# Altium PCB PcbPanel.PcbDoc
Units mm, origin at the board's own origin, x right, y up, seen from the top; angles counter-clockwise.
Board outline 167.8 x 101.4 mm, 2 copper layers (Top Layer, Bottom Layer), stack 1.092 mm thick; 6 components, 178 nets, 10 pads, 0 vias.
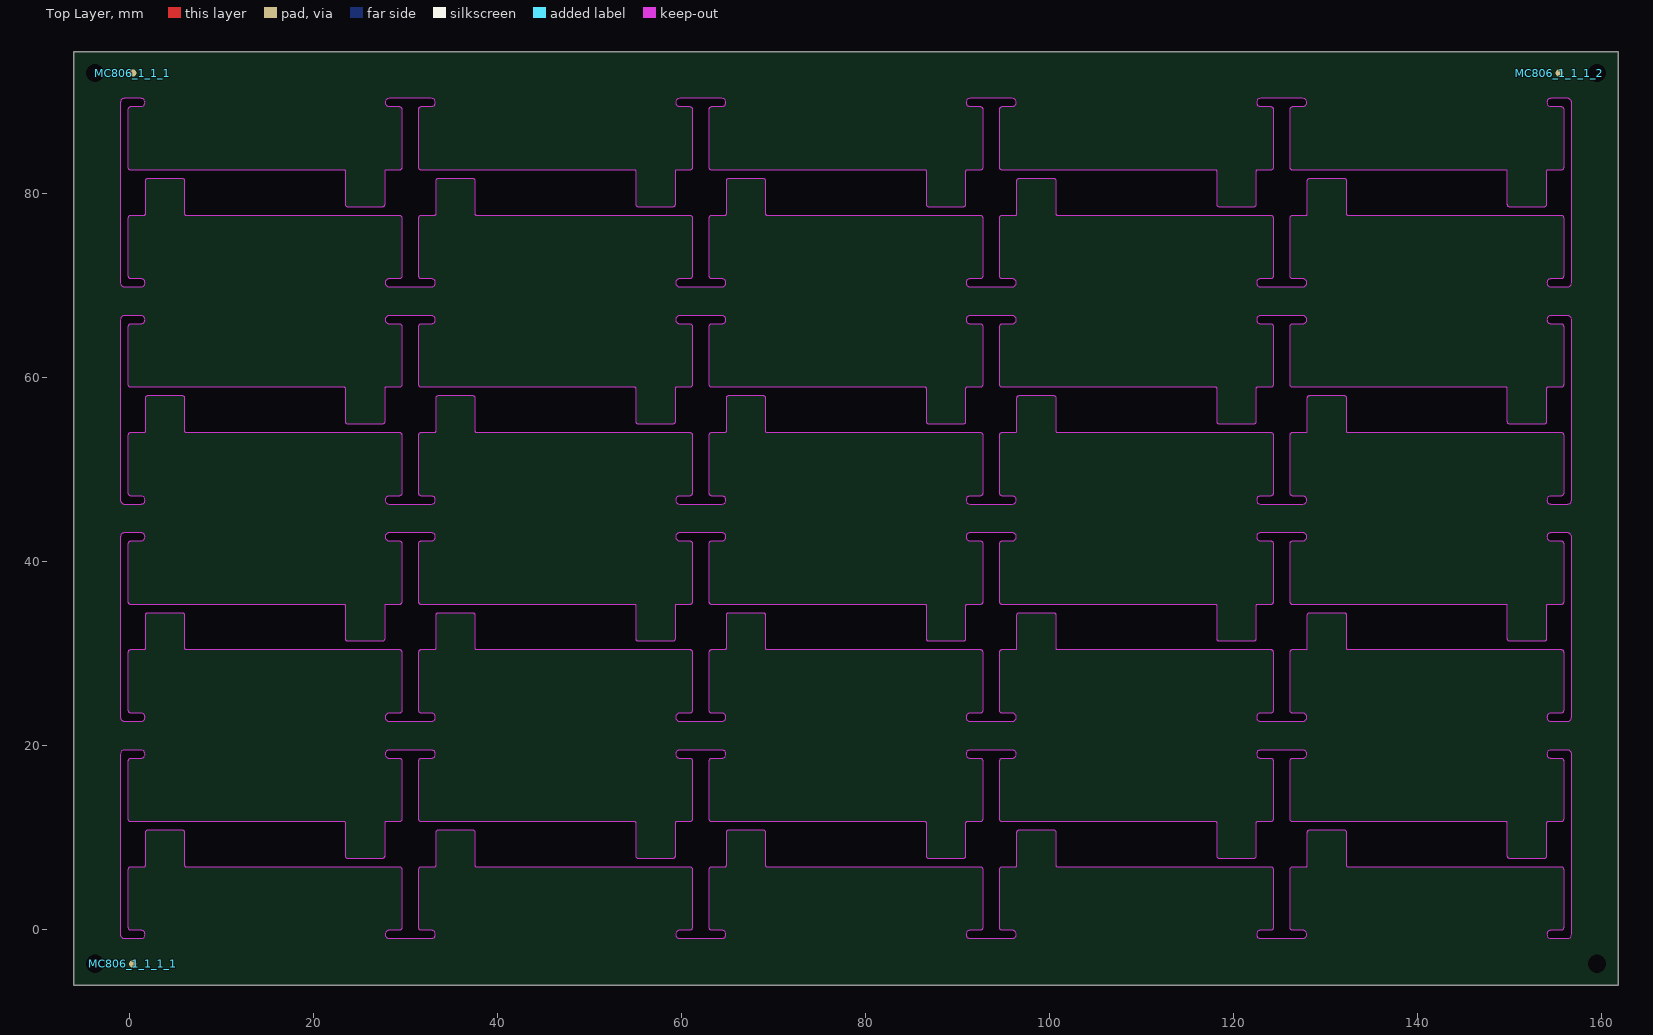
[diagram p0: Top Layer view]
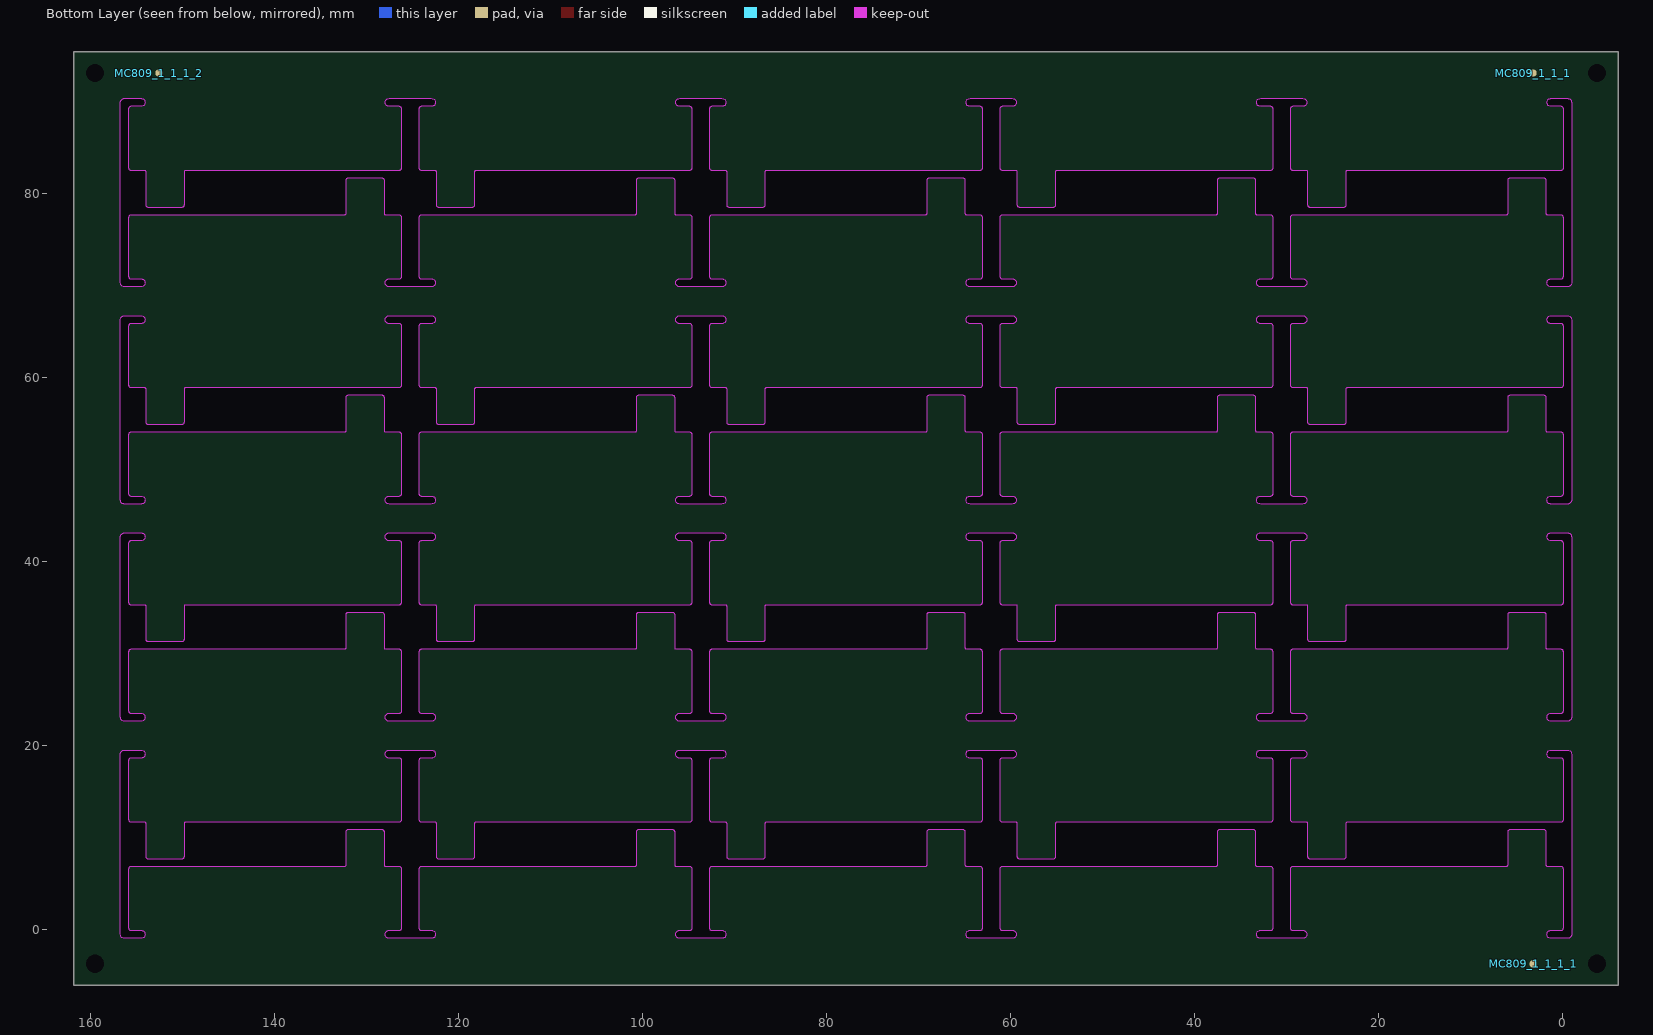
[diagram p1: Bottom Layer view, seen from below]

## Layer stack, top to bottom
Top Solder: solder mask 0.0102, SM-001, Dk 4
Top Layer: signal copper 0.0356
Dielectric 1: prepreg 0.2104, PP-017, Dk 4.3
Dielectric 3: core 0.6, Core-039, Dk 4.8
Dielectric 5: prepreg 0.2104, PP-017, Dk 4.3
Bottom Layer: signal copper 0.0356
Bottom Solder: solder mask 0.0102, SM-001, Dk 4

## Board outline
-6,-6 -6,95.4 161.8,95.4 161.8,-6
cut-out: -0.936,46.7 ccw(c-0.5,46.7) -0.5,46.264 1.3,46.264 1.301,46.264 ccw(c1.3,46.7) 1.736,46.7 ccw(c1.3,46.7) 1.3,47.136 0.2,47.136 cw(c0.2,47.4) -0.064,47.4 -0.064,53.8 cw(c0.2,53.8) 0.2,54.064 1.66,54.064 ccw(c1.66,54.2) 1.796,54.2 1.796,57.8 cw(c2.06,57.8) 2.06,58.064 5.76,58.064 cw(c5.76,57.8) 6.024,57.8 6.024,54.2 ccw(c6.16,54.2) 6.16,54.064 29.36,54.064 cw(c29.36,53.8) 29.624,53.8 29.624,47.4 29.624,47.395 cw(c29.36,47.4) 29.36,47.136 28.26,47.136 28.258,47.136 ccw(c28.26,46.7) 27.823,46.7 ccw(c28.26,46.7) 28.259,46.264 28.26,46.264 32.86,46.264 32.861,46.264 ccw(c32.86,46.7) 33.296,46.7 ccw(c32.86,46.7) 32.86,47.136 31.76,47.136 cw(c31.76,47.4) 31.496,47.4 31.496,53.8 cw(c31.76,53.8) 31.76,54.064 33.22,54.064 ccw(c33.22,54.2) 33.356,54.2 33.356,57.8 cw(c33.62,57.8) 33.62,58.064 37.32,58.064 cw(c37.32,57.8) 37.584,57.8 37.584,54.2 ccw(c37.72,54.2) 37.72,54.064 60.92,54.064 cw(c60.92,53.8) 61.184,53.8 61.184,47.4 61.184,47.395 cw(c60.92,47.4) 60.92,47.136 59.82,47.136 59.818,47.136 ccw(c59.82,46.7) 59.383,46.7 ccw(c59.82,46.7) 59.819,46.264 59.82,46.264 64.42,46.264 64.421,46.264 ccw(c64.42,46.7) 64.856,46.7 ccw(c64.42,46.7) 64.42,47.136 63.32,47.136 cw(c63.32,47.4) 63.056,47.4 63.056,53.8 cw(c63.32,53.8) 63.32,54.064 64.78,54.064 ccw(c64.78,54.2) 64.916,54.2 64.916,57.8 cw(c65.18,57.8) 65.18,58.064 68.88,58.064 cw(c68.88,57.8) 69.144,57.8 69.144,54.2 ccw(c69.28,54.2) 69.28,54.064 92.48,54.064 cw(c92.48,53.8) 92.744,53.8 92.744,47.4 92.744,47.395 cw(c92.48,47.4) 92.48,47.136 91.38,47.136 91.378,47.136 ccw(c91.38,46.7) 90.943,46.7 ccw(c91.38,46.7) 91.379,46.264 91.38,46.264 95.98,46.264 95.981,46.264 ccw(c95.98,46.7) 96.416,46.7 ccw(c95.98,46.7) 95.98,47.136 94.88,47.136 cw(c94.88,47.4) 94.616,47.4 94.616,53.8 cw(c94.88,53.8) 94.88,54.064 96.34,54.064 ccw(c96.34,54.2) 96.476,54.2 96.476,57.8 cw(c96.74,57.8) 96.74,58.064 100.44,58.064 cw(c100.44,57.8) 100.704,57.8 100.704,54.2 ccw(c100.84,54.2) 100.84,54.064 124.04,54.064 cw(c124.04,53.8) 124.304,53.8 124.304,47.4 cw(c124.04,47.4) 124.04,47.136 122.94,47.136 122.938,47.136 ccw(c122.94,46.7) 122.504,46.7 ccw(c122.94,46.7) 122.939,46.264 122.94,46.264 127.54,46.264 127.541,46.264 ccw(c127.54,46.7) 127.976,46.7 ccw(c127.54,46.7) 127.54,47.136 126.44,47.136 cw(c126.44,47.4) 126.176,47.4 126.176,53.8 cw(c126.44,53.8) 126.44,54.064 127.9,54.064 ccw(c127.9,54.2) 128.036,54.2 128.036,57.8 cw(c128.3,57.8) 128.3,58.064 132,58.064 cw(c132,57.8) 132.264,57.8 132.264,54.2 ccw(c132.4,54.2) 132.4,54.064 155.6,54.064 cw(c155.6,53.8) 155.864,53.8 155.864,47.4 cw(c155.6,47.4) 155.6,47.136 154.5,47.136 ccw(c154.5,46.7) 154.064,46.7 ccw(c154.5,46.7) 154.499,46.264 154.5,46.264 156.3,46.264 ccw(c156.3,46.7) 156.736,46.696 156.736,46.7 156.736,66.3 ccw(c156.3,66.3) 156.3,66.736 154.5,66.736 154.499,66.736 ccw(c154.5,66.3) 154.064,66.3 ccw(c154.5,66.3) 154.5,65.864 155.6,65.864 cw(c155.6,65.6) 155.864,65.6 155.864,59.2 cw(c155.6,59.2) 155.6,58.936 154.14,58.936 ccw(c154.14,58.8) 154.004,58.8 154.004,55.2 cw(c153.74,55.2) 153.74,54.936 150.04,54.936 cw(c150.04,55.2) 149.776,55.2 149.776,58.8 ccw(c149.64,58.8) 149.64,58.936 126.44,58.936 cw(c126.44,59.2) 126.176,59.2 126.176,65.6 126.176,65.605 cw(c126.44,65.6) 126.44,65.864 127.539,65.864 127.542,65.864 ccw(c127.54,66.3) 127.976,66.3 ccw(c127.54,66.3) 127.541,66.736 127.54,66.736 122.94,66.736 122.939,66.736 ccw(c122.94,66.3) 122.504,66.3 ccw(c122.94,66.3) 122.94,65.864 124.04,65.864 cw(c124.04,65.6) 124.304,65.6 124.304,59.2 cw(c124.04,59.2) 124.04,58.936 122.58,58.936 ccw(c122.58,58.8) 122.444,58.8 122.444,55.2 cw(c122.18,55.2) 122.18,54.936 118.48,54.936 cw(c118.48,55.2) 118.216,55.2 118.216,58.8 ccw(c118.08,58.8) 118.08,58.936 94.88,58.936 cw(c94.88,59.2) 94.616,59.2 94.616,65.6 94.616,65.605 cw(c94.88,65.6) 94.88,65.864 95.979,65.864 95.982,65.864 ccw(c95.98,66.3) 96.416,66.3 ccw(c95.98,66.3) 95.981,66.736 95.98,66.736 91.38,66.736 91.379,66.736 ccw(c91.38,66.3) 90.944,66.3 ccw(c91.38,66.3) 91.38,65.864 92.48,65.864 cw(c92.48,65.6) 92.744,65.6 92.744,59.2 cw(c92.48,59.2) 92.48,58.936 91.02,58.936 ccw(c91.02,58.8) 90.884,58.8 90.884,55.2 cw(c90.62,55.2) 90.62,54.936 86.92,54.936 cw(c86.92,55.2) 86.656,55.2 86.656,58.8 ccw(c86.52,58.8) 86.52,58.936 63.32,58.936 cw(c63.32,59.2) 63.056,59.2 63.056,65.6 63.056,65.605 cw(c63.32,65.6) 63.32,65.864 64.419,65.864 64.422,65.864 ccw(c64.42,66.3) 64.856,66.3 ccw(c64.42,66.3) 64.421,66.736 64.42,66.736 59.82,66.736 59.819,66.736 ccw(c59.82,66.3) 59.384,66.3 ccw(c59.82,66.3) 59.82,65.864 60.92,65.864 cw(c60.92,65.6) 61.184,65.6 61.184,59.2 cw(c60.92,59.2) 60.92,58.936 59.46,58.936 ccw(c59.46,58.8) 59.324,58.8 59.324,55.2 cw(c59.06,55.2) 59.06,54.936 55.36,54.936 cw(c55.36,55.2) 55.096,55.2 55.096,58.8 ccw(c54.96,58.8) 54.96,58.936 31.76,58.936 cw(c31.76,59.2) 31.496,59.2 31.496,65.6 cw(c31.76,65.6) 31.76,65.864 32.859,65.864 32.861,65.864 ccw(c32.86,66.3) 33.296,66.3 ccw(c32.86,66.3) 32.861,66.736 32.86,66.736 28.26,66.736 28.259,66.736 ccw(c28.26,66.3) 27.823,66.3 ccw(c28.26,66.3) 28.26,65.864 29.36,65.864 cw(c29.36,65.6) 29.624,65.6 29.624,59.2 cw(c29.36,59.2) 29.36,58.936 27.9,58.936 ccw(c27.9,58.8) 27.764,58.8 27.764,55.2 cw(c27.5,55.2) 27.5,54.936 23.8,54.936 cw(c23.8,55.2) 23.536,55.2 23.536,58.8 ccw(c23.4,58.8) 23.4,58.936 0.2,58.936 cw(c0.2,59.2) -0.064,59.2 -0.064,65.6 cw(c0.2,65.6) 0.2,65.864 1.3,65.864 ccw(c1.3,66.3) 1.736,66.3 ccw(c1.3,66.3) 1.3,66.736 -0.5,66.736 ccw(c-0.5,66.3) -0.936,66.304 -0.936,66.3
cut-out: -0.936,70.3 ccw(c-0.5,70.3) -0.5,69.864 1.3,69.864 1.301,69.864 ccw(c1.3,70.3) 1.736,70.3 ccw(c1.3,70.3) 1.3,70.736 0.2,70.736 cw(c0.2,71) -0.064,71 -0.064,77.4 cw(c0.2,77.4) 0.2,77.664 1.66,77.664 ccw(c1.66,77.8) 1.796,77.8 1.796,81.4 cw(c2.06,81.4) 2.06,81.664 5.76,81.664 cw(c5.76,81.4) 6.024,81.4 6.024,77.8 ccw(c6.16,77.8) 6.16,77.664 29.36,77.664 cw(c29.36,77.4) 29.624,77.4 29.624,71 29.623,70.995 cw(c29.36,71) 29.36,70.736 28.26,70.736 28.258,70.736 ccw(c28.26,70.3) 27.823,70.3 ccw(c28.26,70.3) 28.259,69.864 28.26,69.864 32.86,69.864 32.861,69.864 ccw(c32.86,70.3) 33.296,70.3 ccw(c32.86,70.3) 32.86,70.736 31.76,70.736 cw(c31.76,71) 31.496,71 31.496,77.4 cw(c31.76,77.4) 31.76,77.664 33.22,77.664 ccw(c33.22,77.8) 33.356,77.8 33.356,81.4 cw(c33.62,81.4) 33.62,81.664 37.32,81.664 cw(c37.32,81.4) 37.584,81.4 37.584,77.8 ccw(c37.72,77.8) 37.72,77.664 60.92,77.664 cw(c60.92,77.4) 61.184,77.4 61.184,71 61.183,70.995 cw(c60.92,71) 60.92,70.736 59.82,70.736 59.818,70.736 ccw(c59.82,70.3) 59.383,70.3 ccw(c59.82,70.3) 59.819,69.864 59.82,69.864 64.42,69.864 64.421,69.864 ccw(c64.42,70.3) 64.856,70.3 ccw(c64.42,70.3) 64.42,70.736 63.32,70.736 cw(c63.32,71) 63.056,71 63.056,77.4 cw(c63.32,77.4) 63.32,77.664 64.78,77.664 ccw(c64.78,77.8) 64.916,77.8 64.916,81.4 cw(c65.18,81.4) 65.18,81.664 68.88,81.664 cw(c68.88,81.4) 69.144,81.4 69.144,77.8 ccw(c69.28,77.8) 69.28,77.664 92.48,77.664 cw(c92.48,77.4) 92.744,77.4 92.744,71 92.744,70.995 cw(c92.48,71) 92.48,70.736 91.38,70.736 91.378,70.736 ccw(c91.38,70.3) 90.943,70.3 ccw(c91.38,70.3) 91.379,69.864 91.38,69.864 95.98,69.864 95.981,69.864 ccw(c95.98,70.3) 96.416,70.3 ccw(c95.98,70.3) 95.98,70.736 94.88,70.736 cw(c94.88,71) 94.616,71 94.616,77.4 cw(c94.88,77.4) 94.88,77.664 96.34,77.664 ccw(c96.34,77.8) 96.476,77.8 96.476,81.4 cw(c96.74,81.4) 96.74,81.664 100.44,81.664 cw(c100.44,81.4) 100.704,81.4 100.704,77.8 ccw(c100.84,77.8) 100.84,77.664 124.04,77.664 cw(c124.04,77.4) 124.304,77.4 124.304,71 cw(c124.04,71) 124.04,70.736 122.94,70.736 122.938,70.736 ccw(c122.94,70.3) 122.504,70.3 ccw(c122.94,70.3) 122.939,69.864 122.94,69.864 127.54,69.864 127.541,69.864 ccw(c127.54,70.3) 127.976,70.3 ccw(c127.54,70.3) 127.54,70.736 126.44,70.736 cw(c126.44,71) 126.176,71 126.176,77.4 cw(c126.44,77.4) 126.44,77.664 127.9,77.664 ccw(c127.9,77.8) 128.036,77.8 128.036,81.4 cw(c128.3,81.4) 128.3,81.664 132,81.664 cw(c132,81.4) 132.264,81.4 132.264,77.8 ccw(c132.4,77.8) 132.4,77.664 155.6,77.664 cw(c155.6,77.4) 155.864,77.4 155.864,71 cw(c155.6,71) 155.6,70.736 154.5,70.736 ccw(c154.5,70.3) 154.064,70.3 ccw(c154.5,70.3) 154.499,69.864 154.5,69.864 156.3,69.864 ccw(c156.3,70.3) 156.736,70.296 156.736,70.3 156.736,89.9 ccw(c156.3,89.9) 156.3,90.336 154.5,90.336 154.499,90.336 ccw(c154.5,89.9) 154.064,89.9 ccw(c154.5,89.9) 154.5,89.464 155.6,89.464 cw(c155.6,89.2) 155.864,89.2 155.864,82.8 cw(c155.6,82.8) 155.6,82.536 154.14,82.536 ccw(c154.14,82.4) 154.004,82.4 154.004,78.8 cw(c153.74,78.8) 153.74,78.536 150.04,78.536 cw(c150.04,78.8) 149.776,78.8 149.776,82.4 ccw(c149.64,82.4) 149.64,82.536 126.44,82.536 cw(c126.44,82.8) 126.176,82.8 126.176,89.2 126.176,89.205 cw(c126.44,89.2) 126.44,89.464 127.539,89.464 127.542,89.464 ccw(c127.54,89.9) 127.976,89.9 ccw(c127.54,89.9) 127.541,90.336 127.54,90.336 122.94,90.336 122.939,90.336 ccw(c122.94,89.9) 122.504,89.9 ccw(c122.94,89.9) 122.94,89.464 124.04,89.464 cw(c124.04,89.2) 124.304,89.2 124.304,82.8 cw(c124.04,82.8) 124.04,82.536 122.58,82.536 ccw(c122.58,82.4) 122.444,82.4 122.444,78.8 cw(c122.18,78.8) 122.18,78.536 118.48,78.536 cw(c118.48,78.8) 118.216,78.8 118.216,82.4 ccw(c118.08,82.4) 118.08,82.536 94.88,82.536 cw(c94.88,82.8) 94.616,82.8 94.616,89.2 94.616,89.205 cw(c94.88,89.2) 94.88,89.464 95.979,89.464 95.982,89.464 ccw(c95.98,89.9) 96.416,89.9 ccw(c95.98,89.9) 95.981,90.336 95.98,90.336 91.38,90.336 91.379,90.336 ccw(c91.38,89.9) 90.944,89.9 ccw(c91.38,89.9) 91.38,89.464 92.48,89.464 cw(c92.48,89.2) 92.744,89.2 92.744,82.8 cw(c92.48,82.8) 92.48,82.536 91.02,82.536 ccw(c91.02,82.4) 90.884,82.4 90.884,78.8 cw(c90.62,78.8) 90.62,78.536 86.92,78.536 cw(c86.92,78.8) 86.656,78.8 86.656,82.4 ccw(c86.52,82.4) 86.52,82.536 63.32,82.536 cw(c63.32,82.8) 63.056,82.8 63.056,89.2 63.056,89.205 cw(c63.32,89.2) 63.32,89.464 64.419,89.464 64.422,89.464 ccw(c64.42,89.9) 64.856,89.9 ccw(c64.42,89.9) 64.421,90.336 64.42,90.336 59.82,90.336 59.819,90.336 ccw(c59.82,89.9) 59.384,89.9 ccw(c59.82,89.9) 59.82,89.464 60.92,89.464 cw(c60.92,89.2) 61.184,89.2 61.184,82.8 cw(c60.92,82.8) 60.92,82.536 59.46,82.536 ccw(c59.46,82.4) 59.324,82.4 59.324,78.8 cw(c59.06,78.8) 59.06,78.536 55.36,78.536 cw(c55.36,78.8) 55.096,78.8 55.096,82.4 ccw(c54.96,82.4) 54.96,82.536 31.76,82.536 cw(c31.76,82.8) 31.496,82.8 31.496,89.2 cw(c31.76,89.2) 31.76,89.464 32.859,89.464 32.861,89.464 ccw(c32.86,89.9) 33.296,89.9 ccw(c32.86,89.9) 32.861,90.336 32.86,90.336 28.26,90.336 28.259,90.336 ccw(c28.26,89.9) 27.823,89.9 ccw(c28.26,89.9) 28.26,89.464 29.36,89.464 cw(c29.36,89.2) 29.624,89.2 29.624,82.8 cw(c29.36,82.8) 29.36,82.536 27.9,82.536 ccw(c27.9,82.4) 27.764,82.4 27.764,78.8 cw(c27.5,78.8) 27.5,78.536 23.8,78.536 cw(c23.8,78.8) 23.536,78.8 23.536,82.4 ccw(c23.4,82.4) 23.4,82.536 0.2,82.536 cw(c0.2,82.8) -0.064,82.8 -0.064,89.2 cw(c0.2,89.2) 0.2,89.464 1.3,89.464 ccw(c1.3,89.9) 1.736,89.9 ccw(c1.3,89.9) 1.3,90.336 -0.5,90.336 ccw(c-0.5,89.9) -0.936,89.904 -0.936,89.9
cut-out: -0.936,23.1 ccw(c-0.5,23.1) -0.5,22.664 1.3,22.664 1.301,22.664 ccw(c1.3,23.1) 1.736,23.1 ccw(c1.3,23.1) 1.3,23.536 0.2,23.536 cw(c0.2,23.8) -0.064,23.8 -0.064,30.2 cw(c0.2,30.2) 0.2,30.464 1.66,30.464 ccw(c1.66,30.6) 1.796,30.6 1.796,34.2 cw(c2.06,34.2) 2.06,34.464 5.76,34.464 cw(c5.76,34.2) 6.024,34.2 6.024,30.6 ccw(c6.16,30.6) 6.16,30.464 29.36,30.464 cw(c29.36,30.2) 29.624,30.2 29.624,23.8 29.624,23.795 cw(c29.36,23.8) 29.36,23.536 28.26,23.536 28.258,23.536 ccw(c28.26,23.1) 27.823,23.1 ccw(c28.26,23.1) 28.259,22.664 28.26,22.664 32.86,22.664 32.861,22.664 ccw(c32.86,23.1) 33.296,23.1 ccw(c32.86,23.1) 32.86,23.536 31.76,23.536 cw(c31.76,23.8) 31.496,23.8 31.496,30.2 cw(c31.76,30.2) 31.76,30.464 33.22,30.464 ccw(c33.22,30.6) 33.356,30.6 33.356,34.2 cw(c33.62,34.2) 33.62,34.464 37.32,34.464 cw(c37.32,34.2) 37.584,34.2 37.584,30.6 ccw(c37.72,30.6) 37.72,30.464 60.92,30.464 cw(c60.92,30.2) 61.184,30.2 61.184,23.8 61.184,23.795 cw(c60.92,23.8) 60.92,23.536 59.82,23.536 59.818,23.536 ccw(c59.82,23.1) 59.383,23.1 ccw(c59.82,23.1) 59.819,22.664 59.82,22.664 64.42,22.664 64.421,22.664 ccw(c64.42,23.1) 64.856,23.1 ccw(c64.42,23.1) 64.42,23.536 63.32,23.536 cw(c63.32,23.8) 63.056,23.8 63.056,30.2 cw(c63.32,30.2) 63.32,30.464 64.78,30.464 ccw(c64.78,30.6) 64.916,30.6 64.916,34.2 cw(c65.18,34.2) 65.18,34.464 68.88,34.464 cw(c68.88,34.2) 69.144,34.2 69.144,30.6 ccw(c69.28,30.6) 69.28,30.464 92.48,30.464 cw(c92.48,30.2) 92.744,30.2 92.744,23.8 92.744,23.795 cw(c92.48,23.8) 92.48,23.536 91.38,23.536 91.378,23.536 ccw(c91.38,23.1) 90.943,23.1 ccw(c91.38,23.1) 91.379,22.664 91.38,22.664 95.98,22.664 95.981,22.664 ccw(c95.98,23.1) 96.416,23.1 ccw(c95.98,23.1) 95.98,23.536 94.88,23.536 cw(c94.88,23.8) 94.616,23.8 94.616,30.2 cw(c94.88,30.2) 94.88,30.464 96.34,30.464 ccw(c96.34,30.6) 96.476,30.6 96.476,34.2 cw(c96.74,34.2) 96.74,34.464 100.44,34.464 cw(c100.44,34.2) 100.704,34.2 100.704,30.6 ccw(c100.84,30.6) 100.84,30.464 124.04,30.464 cw(c124.04,30.2) 124.304,30.2 124.304,23.8 cw(c124.04,23.8) 124.04,23.536 122.94,23.536 122.938,23.536 ccw(c122.94,23.1) 122.504,23.1 ccw(c122.94,23.1) 122.939,22.664 122.94,22.664 127.54,22.664 127.541,22.664 ccw(c127.54,23.1) 127.976,23.1 ccw(c127.54,23.1) 127.54,23.536 126.44,23.536 cw(c126.44,23.8) 126.176,23.8 126.176,30.2 cw(c126.44,30.2) 126.44,30.464 127.9,30.464 ccw(c127.9,30.6) 128.036,30.6 128.036,34.2 cw(c128.3,34.2) 128.3,34.464 132,34.464 cw(c132,34.2) 132.264,34.2 132.264,30.6 ccw(c132.4,30.6) 132.4,30.464 155.6,30.464 cw(c155.6,30.2) 155.864,30.2 155.864,23.8 cw(c155.6,23.8) 155.6,23.536 154.5,23.536 ccw(c154.5,23.1) 154.064,23.1 ccw(c154.5,23.1) 154.499,22.664 154.5,22.664 156.3,22.664 ccw(c156.3,23.1) 156.736,23.096 156.736,23.1 156.736,42.7 ccw(c156.3,42.7) 156.3,43.136 154.5,43.136 154.499,43.136 ccw(c154.5,42.7) 154.064,42.7 ccw(c154.5,42.7) 154.5,42.264 155.6,42.264 cw(c155.6,42) 155.864,42 155.864,35.6 cw(c155.6,35.6) 155.6,35.336 154.14,35.336 ccw(c154.14,35.2) 154.004,35.2 154.004,31.6 cw(c153.74,31.6) 153.74,31.336 150.04,31.336 cw(c150.04,31.6) 149.776,31.6 149.776,35.2 ccw(c149.64,35.2) 149.64,35.336 126.44,35.336 cw(c126.44,35.6) 126.176,35.6 126.176,42 126.176,42.005 cw(c126.44,42) 126.44,42.264 127.539,42.264 127.542,42.264 ccw(c127.54,42.7) 127.976,42.7 ccw(c127.54,42.7) 127.541,43.136 127.54,43.136 122.94,43.136 122.939,43.136 ccw(c122.94,42.7) 122.504,42.7 ccw(c122.94,42.7) 122.94,42.264 124.04,42.264 cw(c124.04,42) 124.304,42 124.304,35.6 cw(c124.04,35.6) 124.04,35.336 122.58,35.336 ccw(c122.58,35.2) 122.444,35.2 122.444,31.6 cw(c122.18,31.6) 122.18,31.336 118.48,31.336 cw(c118.48,31.6) 118.216,31.6 118.216,35.2 ccw(c118.08,35.2) 118.08,35.336 94.88,35.336 cw(c94.88,35.6) 94.616,35.6 94.616,42 94.616,42.005 cw(c94.88,42) 94.88,42.264 95.979,42.264 95.982,42.264 ccw(c95.98,42.7) 96.416,42.7 ccw(c95.98,42.7) 95.981,43.136 95.98,43.136 91.38,43.136 91.379,43.136 ccw(c91.38,42.7) 90.944,42.7 ccw(c91.38,42.7) 91.38,42.264 92.48,42.264 cw(c92.48,42) 92.744,42 92.744,35.6 cw(c92.48,35.6) 92.48,35.336 91.02,35.336 ccw(c91.02,35.2) 90.884,35.2 90.884,31.6 cw(c90.62,31.6) 90.62,31.336 86.92,31.336 cw(c86.92,31.6) 86.656,31.6 86.656,35.2 ccw(c86.52,35.2) 86.52,35.336 63.32,35.336 cw(c63.32,35.6) 63.056,35.6 63.056,42 63.056,42.005 cw(c63.32,42) 63.32,42.264 64.419,42.264 64.422,42.264 ccw(c64.42,42.7) 64.856,42.7 ccw(c64.42,42.7) 64.421,43.136 64.42,43.136 59.82,43.136 59.819,43.136 ccw(c59.82,42.7) 59.384,42.7 ccw(c59.82,42.7) 59.82,42.264 60.92,42.264 cw(c60.92,42) 61.184,42 61.184,35.6 cw(c60.92,35.6) 60.92,35.336 59.46,35.336 ccw(c59.46,35.2) 59.324,35.2 59.324,31.6 cw(c59.06,31.6) 59.06,31.336 55.36,31.336 cw(c55.36,31.6) 55.096,31.6 55.096,35.2 ccw(c54.96,35.2) 54.96,35.336 31.76,35.336 cw(c31.76,35.6) 31.496,35.6 31.496,42 cw(c31.76,42) 31.76,42.264 32.859,42.264 32.861,42.264 ccw(c32.86,42.7) 33.296,42.7 ccw(c32.86,42.7) 32.861,43.136 32.86,43.136 28.26,43.136 28.259,43.136 ccw(c28.26,42.7) 27.823,42.7 ccw(c28.26,42.7) 28.26,42.264 29.36,42.264 cw(c29.36,42) 29.624,42 29.624,35.6 cw(c29.36,35.6) 29.36,35.336 27.9,35.336 ccw(c27.9,35.2) 27.764,35.2 27.764,31.6 cw(c27.5,31.6) 27.5,31.336 23.8,31.336 cw(c23.8,31.6) 23.536,31.6 23.536,35.2 ccw(c23.4,35.2) 23.4,35.336 0.2,35.336 cw(c0.2,35.6) -0.064,35.6 -0.064,42 cw(c0.2,42) 0.2,42.264 1.3,42.264 ccw(c1.3,42.7) 1.736,42.7 ccw(c1.3,42.7) 1.3,43.136 -0.5,43.136 ccw(c-0.5,42.7) -0.936,42.704 -0.936,42.7
cut-out: -0.936,-0.5 ccw(c-0.5,-0.5) -0.5,-0.936 1.3,-0.936 1.301,-0.936 ccw(c1.3,-0.5) 1.736,-0.5 ccw(c1.3,-0.5) 1.3,-0.064 0.2,-0.064 cw(c0.2,0.2) -0.064,0.2 -0.064,6.6 cw(c0.2,6.6) 0.2,6.864 1.66,6.864 ccw(c1.66,7) 1.796,7 1.796,10.6 cw(c2.06,10.6) 2.06,10.864 5.76,10.864 cw(c5.76,10.6) 6.024,10.6 6.024,7 ccw(c6.16,7) 6.16,6.864 29.36,6.864 cw(c29.36,6.6) 29.624,6.6 29.624,0.2 29.624,0.195 cw(c29.36,0.2) 29.36,-0.064 28.26,-0.064 28.258,-0.064 ccw(c28.26,-0.5) 27.823,-0.5 ccw(c28.26,-0.5) 28.259,-0.936 28.26,-0.936 32.86,-0.936 32.861,-0.936 ccw(c32.86,-0.5) 33.296,-0.5 ccw(c32.86,-0.5) 32.86,-0.064 31.76,-0.064 cw(c31.76,0.2) 31.496,0.2 31.496,6.6 cw(c31.76,6.6) 31.76,6.864 33.22,6.864 ccw(c33.22,7) 33.356,7 33.356,10.6 cw(c33.62,10.6) 33.62,10.864 37.32,10.864 cw(c37.32,10.6) 37.584,10.6 37.584,7 ccw(c37.72,7) 37.72,6.864 60.92,6.864 cw(c60.92,6.6) 61.184,6.6 61.184,0.2 61.184,0.195 cw(c60.92,0.2) 60.92,-0.064 59.82,-0.064 59.818,-0.064 ccw(c59.82,-0.5) 59.383,-0.5 ccw(c59.82,-0.5) 59.819,-0.936 59.82,-0.936 64.42,-0.936 64.421,-0.936 ccw(c64.42,-0.5) 64.856,-0.5 ccw(c64.42,-0.5) 64.42,-0.064 63.32,-0.064 cw(c63.32,0.2) 63.056,0.2 63.056,6.6 cw(c63.32,6.6) 63.32,6.864 64.78,6.864 ccw(c64.78,7) 64.916,7 64.916,10.6 cw(c65.18,10.6) 65.18,10.864 68.88,10.864 cw(c68.88,10.6) 69.144,10.6 69.144,7 ccw(c69.28,7) 69.28,6.864 92.48,6.864 cw(c92.48,6.6) 92.744,6.6 92.744,0.2 92.744,0.195 cw(c92.48,0.2) 92.48,-0.064 91.38,-0.064 91.378,-0.064 ccw(c91.38,-0.5) 90.943,-0.5 ccw(c91.38,-0.5) 91.379,-0.936 91.38,-0.936 95.98,-0.936 95.981,-0.936 ccw(c95.98,-0.5) 96.416,-0.5 ccw(c95.98,-0.5) 95.98,-0.064 94.88,-0.064 cw(c94.88,0.2) 94.616,0.2 94.616,6.6 cw(c94.88,6.6) 94.88,6.864 96.34,6.864 ccw(c96.34,7) 96.476,7 96.476,10.6 cw(c96.74,10.6) 96.74,10.864 100.44,10.864 cw(c100.44,10.6) 100.704,10.6 100.704,7 ccw(c100.84,7) 100.84,6.864 124.04,6.864 cw(c124.04,6.6) 124.304,6.6 124.304,0.2 cw(c124.04,0.2) 124.04,-0.064 122.94,-0.064 122.938,-0.064 ccw(c122.94,-0.5) 122.504,-0.5 ccw(c122.94,-0.5) 122.939,-0.936 122.94,-0.936 127.54,-0.936 127.541,-0.936 ccw(c127.54,-0.5) 127.976,-0.5 ccw(c127.54,-0.5) 127.54,-0.064 126.44,-0.064 cw(c126.44,0.2) 126.176,0.2 126.176,6.6 cw(c126.44,6.6) 126.44,6.864 127.9,6.864 ccw(c127.9,7) 128.036,7 128.036,10.6 cw(c128.3,10.6) 128.3,10.864 132,10.864 cw(c132,10.6) 132.264,10.6 132.264,7 ccw(c132.4,7) 132.4,6.864 155.6,6.864 cw(c155.6,6.6) 155.864,6.6 155.864,0.2 cw(c155.6,0.2) 155.6,-0.064 154.5,-0.064 ccw(c154.5,-0.5) 154.064,-0.5 ccw(c154.5,-0.5) 154.499,-0.936 154.5,-0.936 156.3,-0.936 ccw(c156.3,-0.5) 156.736,-0.504 156.736,-0.5 156.736,19.1 ccw(c156.3,19.1) 156.3,19.536 154.5,19.536 154.499,19.536 ccw(c154.5,19.1) 154.064,19.1 ccw(c154.5,19.1) 154.5,18.664 155.6,18.664 cw(c155.6,18.4) 155.864,18.4 155.864,12 cw(c155.6,12) 155.6,11.736 154.14,11.736 ccw(c154.14,11.6) 154.004,11.6 154.004,8 cw(c153.74,8) 153.74,7.736 150.04,7.736 cw(c150.04,8) 149.776,8 149.776,11.6 ccw(c149.64,11.6) 149.64,11.736 126.44,11.736 cw(c126.44,12) 126.176,12 126.176,18.4 126.176,18.405 cw(c126.44,18.4) 126.44,18.664 127.539,18.664 127.542,18.664 ccw(c127.54,19.1) 127.976,19.1 ccw(c127.54,19.1) 127.541,19.536 127.54,19.536 122.94,19.536 122.939,19.536 ccw(c122.94,19.1) 122.504,19.1 ccw(c122.94,19.1) 122.94,18.664 124.04,18.664 cw(c124.04,18.4) 124.304,18.4 124.304,12 cw(c124.04,12) 124.04,11.736 122.58,11.736 ccw(c122.58,11.6) 122.444,11.6 122.444,8 cw(c122.18,8) 122.18,7.736 118.48,7.736 cw(c118.48,8) 118.216,8 118.216,11.6 ccw(c118.08,11.6) 118.08,11.736 94.88,11.736 cw(c94.88,12) 94.616,12 94.616,18.4 94.616,18.405 cw(c94.88,18.4) 94.88,18.664 95.979,18.664 95.982,18.664 ccw(c95.98,19.1) 96.416,19.1 ccw(c95.98,19.1) 95.981,19.536 95.98,19.536 91.38,19.536 91.379,19.536 ccw(c91.38,19.1) 90.944,19.1 ccw(c91.38,19.1) 91.38,18.664 92.48,18.664 cw(c92.48,18.4) 92.744,18.4 92.744,12 cw(c92.48,12) 92.48,11.736 91.02,11.736 ccw(c91.02,11.6) 90.884,11.6 90.884,8 cw(c90.62,8) 90.62,7.736 86.92,7.736 cw(c86.92,8) 86.656,8 86.656,11.6 ccw(c86.52,11.6) 86.52,11.736 63.32,11.736 cw(c63.32,12) 63.056,12 63.056,18.4 63.056,18.405 cw(c63.32,18.4) 63.32,18.664 64.419,18.664 64.422,18.664 ccw(c64.42,19.1) 64.856,19.1 ccw(c64.42,19.1) 64.421,19.536 64.42,19.536 59.82,19.536 59.819,19.536 ccw(c59.82,19.1) 59.384,19.1 ccw(c59.82,19.1) 59.82,18.664 60.92,18.664 cw(c60.92,18.4) 61.184,18.4 61.184,12 cw(c60.92,12) 60.92,11.736 59.46,11.736 ccw(c59.46,11.6) 59.324,11.6 59.324,8 cw(c59.06,8) 59.06,7.736 55.36,7.736 cw(c55.36,8) 55.096,8 55.096,11.6 ccw(c54.96,11.6) 54.96,11.736 31.76,11.736 cw(c31.76,12) 31.496,12 31.496,18.4 cw(c31.76,18.4) 31.76,18.664 32.859,18.664 32.861,18.664 ccw(c32.86,19.1) 33.296,19.1 ccw(c32.86,19.1) 32.861,19.536 32.86,19.536 28.26,19.536 28.259,19.536 ccw(c28.26,19.1) 27.823,19.1 ccw(c28.26,19.1) 28.26,18.664 29.36,18.664 cw(c29.36,18.4) 29.624,18.4 29.624,12 cw(c29.36,12) 29.36,11.736 27.9,11.736 ccw(c27.9,11.6) 27.764,11.6 27.764,8 cw(c27.5,8) 27.5,7.736 23.8,7.736 cw(c23.8,8) 23.536,8 23.536,11.6 ccw(c23.4,11.6) 23.4,11.736 0.2,11.736 cw(c0.2,12) -0.064,12 -0.064,18.4 cw(c0.2,18.4) 0.2,18.664 1.3,18.664 ccw(c1.3,19.1) 1.736,19.1 ccw(c1.3,19.1) 1.3,19.536 -0.5,19.536 ccw(c-0.5,19.1) -0.936,19.104 -0.936,19.1

## Design rules (kind name [scope] priority, off if disabled: settings)
AssemblyTestPointUsage [All] p1: valid=2
AssemblyTestpoint [(IsPad And (OnTopLayer Or OnBottomLayer))] p1: testpointundercomponent=FALSE minsize=1.016 maxsize=2.54 preferedsize=1.524 minholesize=0 maxholesize=1.016 preferedholesize=0.813 testpointgrid=0.025 usegrid=TRUE gridtolerance=0 allowsidebottom=TRUE
BoardOutlineClearance [All] p1: gap=0.1 ignorepadtopadclearanceinfootprint=FALSE
Clearance [All] p1: gap=0.14 ignorepadtopadclearanceinfootprint=FALSE
ComponentClearance [All] p1 off: gap=0.254 collisioncheckmode=3 verticalgap=0.254 showdistances=FALSE
DiffPairsRouting [All] p1: maxlimit=0.254 minlimit=0.15 mostfreqgap=0.254 toplayer_minwidth=0.14 toplayer_maxwidth=0.381 toplayer_prefwidth=0.2 bottomlayer_minwidth=0.14 bottomlayer_maxwidth=0.381 bottomlayer_prefwidth=0.2 maxuncoupledlength=12.7
Height [All] p1: minheight=0 maxheight=100.4 prefheight=12.7
HoleSize [All] p1: absolutevalues=TRUE maxlimit=10 minlimit=0.127 maxpercent=80.000 minpercent=20.000
HoleToHoleClearance [All] p1: gap=0.241 allowstackedmicrovias=TRUE
MinimumAnnularRing [All] p1: minimumring=0.051
MinimumSolderMaskSliver [All] p1: minsoldermaskwidth=0.05
PasteMaskExpansion [All] p1: expansion=-0.05
PolygonConnect PWR [InNetClass('PWR') vs InNetClass('PWR')] p1: connectstyle=Direct reliefconductorwidth=0.254 reliefentries=4 polygonreliefangle="90 Angle" airgapwidth=0.254
PolygonConnect RF_GND [InNamedPolygon('GND_BOTTOM_RF')] p2: thpad.connectstyle=Relief thpad.reliefconductorwidth=0.254 thpad.reliefentries=4 thpad.polygonreliefangle="90 Angle" thpad.airgapwidth=0.1 smdpad.connectstyle=Relief smdpad.reliefconductorwidth=0.254 smdpad.reliefentries=4 smdpad.polygonreliefangle="90 Angle" smdpad.airgapwidth=0.1 via.connectstyle=Direct via.reliefconductorwidth=0.254 via.reliefentries=4 via.polygonreliefangle="90 Angle" via.airgapwidth=0.254
PolygonConnect GND [InNet('GND')] p3: thpad.connectstyle=Relief thpad.reliefconductorwidth=0.254 thpad.reliefentries=4 thpad.polygonreliefangle="90 Angle" thpad.airgapwidth=0.254 smdpad.connectstyle=Relief smdpad.reliefconductorwidth=0.254 smdpad.reliefentries=4 smdpad.polygonreliefangle="90 Angle" smdpad.airgapwidth=0.254 via.connectstyle=Direct via.reliefconductorwidth=0.254 via.reliefentries=4 via.polygonreliefangle="90 Angle" via.airgapwidth=0.254
PolygonConnect [All] p4: connectstyle=Direct reliefconductorwidth=0.254 reliefentries=4 polygonreliefangle="90 Angle" airgapwidth=0.254
RoutingVias [All] p1: holewidth=0.15 width=0.35 viastyle="Through Hole" minholewidth=0.127 minwidth=0.25 maxholewidth=0.6 maxwidth=1
SilkToSilkClearance [All] p1: silktosilkclearance=0.05
SilkToSolderMaskClearance [IsPad] p1: minsilkscreentomaskgap=0.05 clearancetoexposedcopper=TRUE
SolderMaskExpansion SolderMaskExpansion_via [IsVia] p1: expansion=0.102 istentingtop=TRUE
SolderMaskExpansion [All] p2: expansion=0.025 istentingtop=FALSE
UnRoutedNet [All] p1: checkbadconnections=TRUE
ViasUnderSMD [All] p1: allowed=TRUE
Width RF [InNetClass('RF')] p1: maxlimit=0.762 minlimit=0.154 preferedwidth=0.236 minimp=50.000000 maximp=50.000000 favimp=50.000000
Width [All] p2: maxlimit=30 minlimit=0.122 preferedwidth=0.2
18 further rules are at their usual default settings.

## Classes and differential pairs
net class RF: RF1 RF2 RF3
component class U_LED: Q14 TP1 TP31 U20
component class PABoostConverter: TP14 TP15 TP16
net class PWR: 3V0 5V0 PA_GATE_SWITCH PA_I_DIFF_N PA_I_DIFF_P PA_PRE_L PA_PST_L PABOOST_SW V_LOAD V_PA V_SYS

## Components (designator, comment, footprint, x,y, rotation, side; value= is the part's Value field where it differs from the comment)
MC806_1_1_1 "Mire_CMS" CMSMires 0.4,93.1 r90 top (schematic designator MC804)
MC806_1_1_1_1 "Mire_CMS" CMSMires 0.4,-3.7 r270 top (schematic designator MC804)
MC806_1_1_1_2 "Mire_CMS" CMSMires 155.4,93.1 r90 top (schematic designator MC804)
MC809_1_1_1 "Mire_CMS" CMSMires 3.25,93.1 r90 bottom (schematic designator MC804)
MC809_1_1_1_1 "Mire_CMS" CMSMires 3.25,-3.7 r270 bottom (schematic designator MC804)
MC809_1_1_1_2 "Mire_CMS" CMSMires 152.55,93.1 r90 bottom (schematic designator MC804)

## Footprints (in the part's own frame and the unit in brackets; to place one, negate y for a bottom-side part, rotate by r counter-clockwise, add the part's x,y. Pads: shape width x height; smd on the part's side, far side on the other; paste and mask are expansions set on the pad)
CMSMires [mm]
  round 0.8 smd paste-0.5 mask+0.2: 1(0,0)

## Part data
MC806_1_1_1 MC806_1_1_1_1 MC806_1_1_1_2 MC809_1_1_1 MC809_1_1_1_1 MC809_1_1_1_2: library part CMSMire, "Mire CMS", FAB=MaScir, REF_FAB=MC1

## Free pads (board coordinates)
  round 0 hole 2 unplated: ""(-3.7,-3.7) ""(-3.7,93.1) ""(159.5,93.1) ""(159.5,-3.7)

## Nets (pads, with @x,y where several pads share a name; then routed paths per layer and width w, separated by ;. In a path a pad name is that pad's centre, name@x,y a point inside that pad or via, vN(x,y) a via of type N, cw(c..) or ccw(c..) an arc to the next point about the centre after c; other vN are vias at no path point)
3V0: 
5V0: 
5V0_FB_AuC: 
5V0BOOST_SW: 
ADC_C\S\_uC: 
ADC_DIN_uC: 
ADC_DOUT_uC: 
ADC_SCLK_uC: 
BAT_NTC: 
Battery_Indicators_LED1: 
Battery_Indicators_LED2: 
Battery_LED1: 
Battery_LED2: 
Battery_LED3: 
Battery_LED4: 
BOOST_FB: 
BTN1: 
BTN1_uC: 
BTN2: 
BTN2_uC: 
CAP1: 
CAP1_uC: 
CAP2: 
CAP2_uC: 
CAP3: 
CAP3_uC: 
CAP4: 
CAP4_uC: 
CAP5: 
CAP5_uC: 
CAP6: 
CAP6_uC: 
CHG_BTST: 
CHG_ILIM: 
CHG_PMIP: 
CHG_QON: 
CHG_REGN: 
CHG_SW: 
CHG_TS_BIAS: 
Continuous_LED1: 
Continuous_LED2: 
DCC: 
DEC1: 
DEC3: 
DEC4_6: 
DEC5: 
Fluid_Indicators_LED1: 
Fluid_Indicators_LED2: 
GND: 
ILOAD: 
Intermittant_LED1: 
Intermittant_LED2: 
LED_SCL: 
LED_SDA: 
Neb_Indicators_LED1: 
Neb_Indicators_LED2: 
NetC200_2: 
NetC202_1: 
NetC216_1: 
NetC218_1: 
NetC219_1: 
NetC220_1: 
NetC222_1: 
NetC223_1: 
NetC225_2: 
NetC226_2: 
NetC407_2: 
NetC413_2: 
NetC500_1: 
NetC500_2: 
NetC501_2: 
NetC502_2: 
NetC503_1: 
NetC503_2: 
NetC504_1: 
NetC504_2: 
NetC700_2: 
NetC713_2: 
NetC903_2: 
NetC908_1: 
NetC919_1: 
NetJ700_1: 
NetJ700_2: 
NetL800_1: 
NetQ200_1: 
NetQ201_1: 
NetQ202_1: 
NetQ203_1: 
NetQ204_1: 
NetQ205_1: 
NetQ206_1: 
NetQ207_1: 
NetQ600_2: 
NetQ600_3: 
NetQ601_2: 
NetQ601_3: 
NetQ700_2: 
NetQ700_3: 
NetQ900_2: 
NetQ900_3: 
NetR209_1: 
NetR404_2: 
NetR407_2: 
NetR600_1: 
NetR602_1: 
NetR700_1: 
NetR709_1: 
NetR712_2: 
NetR713_1: 
NetR713_2: 
NetR900_1: 
NetR901_1: 
NetR904_2: 
NetR905_1: 
NetR906_2: 
NetR907_1: 
NetR915_2: 
NetTP704_TP: 
NetTP705_TP: 
NetTP706_TP: 
NetTP707_TP: 
NetTP708_TP: 
NetTP709_TP: 
NetU600_2: 
NetU600_3: 
NetU703_1: 
NetU704_1: 
NetU705_1: 
NetU800_A16: 
NetU800_B17: 
NetU800_B19: 
P0.00/XL1: 
P0.01/XL2: 
PA_GATE_HG: 
PA_GATE_LG: 
PA_GATE_SWITCH: 
PA_I_AuC: 
PA_I_DIFF_N: 
PA_I_DIFF_P: 
PA_PRE_L: 
PA_PST_L: 
PABOOST_BST: 
PABOOST_COMP: 
PABOOST_DAC_OUT: 
PABOOST_FB: 
PABOOST_SW: 
PABOOST_VCC: 
Power_Adapter_LED1: 
Power_Adapter_LED2: 
RF1: 
RF2: 
RF3: 
RST: 
RX: 
SCL_uC: 
SDA_uC: 
SUPPLY_PROT_PG_uC: 
SWDCLK: 
SWDIO: 
System_Indicators_LED1: 
System_Indicators_LED2: 
TEMP_ALERT_uC: 
TEST0: 
TEST1: 
TX: 
V_BAT: 
V_EXT: 
V_LOAD: 
V_LOAD_ENV: 
V_LOAD_ENV_FB_AuC: 
V_PA: 
V_PA_EN_uC: 
V_PA_FB_AuC: 
V_PA_IN_FB_AuC: 
V_SUPPLY: 
V_SYS: 
XC1: 
XC2: 
pads on no net: MC806_1_1_1.1 MC806_1_1_1_1.1 MC806_1_1_1_2.1 MC809_1_1_1.1 MC809_1_1_1_1.1 MC809_1_1_1_2.1

## Silkscreen, mask and mechanical layers (free items; w line width, h text height)
Dimensions:
  lines w0.127: -11.034,-5.994 -6.284,-5.994 ; -11.034,95.406 -6.284,95.406 ; -6,96.45 -6,101.2 ; 161.8,96.45 161.8,101.2
  lines w0.254: -12.667,-1 -11,-6 ; -12.667,90.4 -11,95.4 ; -11.254,-6 -10.746,-6 ; -11.254,95.4 -10.746,95.4 ; -11,33.918 -11,-6 ; -11,55.482 -11,95.4 ; -9.333,-1 -11,-6 ; -9.333,90.4 -11,95.4 ; -6,101.046 -6,101.554 ; -1,99.633 -6,101.3 ; -1,102.967 -6,101.3 ; 67.118,101.3 -6,101.3 ; 88.682,101.3 161.8,101.3 ; 156.8,99.633 161.8,101.3 ; 156.8,102.967 161.8,101.3 ; 161.8,101.046 161.8,101.554
  text "167.8 (mm)" at 67.372,99.361 h5
  text "101.4 (mm)" at -9.061,34.172 h5 r90
Panel Shape/ Cutout:
  drawing of 980 lines, arcs and shapes, not listed
  text "V-CUT" at 167.1,88.75 h1.1
  text "CNC" at 13.25,79.5 h1.1
  text "V-CUT" at 167.1,70.15 h1.1
  text "V-CUT" at 167.1,65.15 h1.1
  text "CNC" at 13.25,55.9 h1.1
  text "V-CUT" at 167.1,46.55 h1.1
  text "V-CUT" at 167.1,41.55 h1.1
  text "CNC" at 13.25,32.3 h1.1
  text "V-CUT" at 167.1,22.95 h1.1
  text "V-CUT" at 167.1,17.95 h1.1
  text "CNC" at 13.25,8.7 h1.1
  text "V-CUT" at 167.1,-0.65 h1.1

## Panel: embedded boards
"Pcb.PcbDoc" at 0,55, 1 rows x 5 columns, spacing 36 x 31.56, rotation 0
"Pcb.PcbDoc" at 155.8,58, 1 rows x 5 columns, spacing 36 x 31.56, rotation 180
"Pcb.PcbDoc" at 0,78.6, 1 rows x 5 columns, spacing 36 x 31.56, rotation 0
"Pcb.PcbDoc" at 155.8,81.6, 1 rows x 5 columns, spacing 36 x 31.56, rotation 180
"Pcb.PcbDoc" at 155.8,34.4, 1 rows x 5 columns, spacing 36 x 31.56, rotation 180
"Pcb.PcbDoc" at 0,31.4, 1 rows x 5 columns, spacing 36 x 31.56, rotation 0
"Pcb.PcbDoc" at 155.8,10.8, 1 rows x 5 columns, spacing 36 x 31.56, rotation 180
"Pcb.PcbDoc" at 0,7.8, 1 rows x 5 columns, spacing 36 x 31.56, rotation 0